# Altium PCB LED_top_level.PcbDoc
Units mil, origin at the board's own origin, x right, y up, seen from the top; angles counter-clockwise.
Board outline 3920 x 1500 mil, 2 copper layers (Top Layer, Bottom Layer); 44 components, 22 nets, 192 pads, 0 vias.
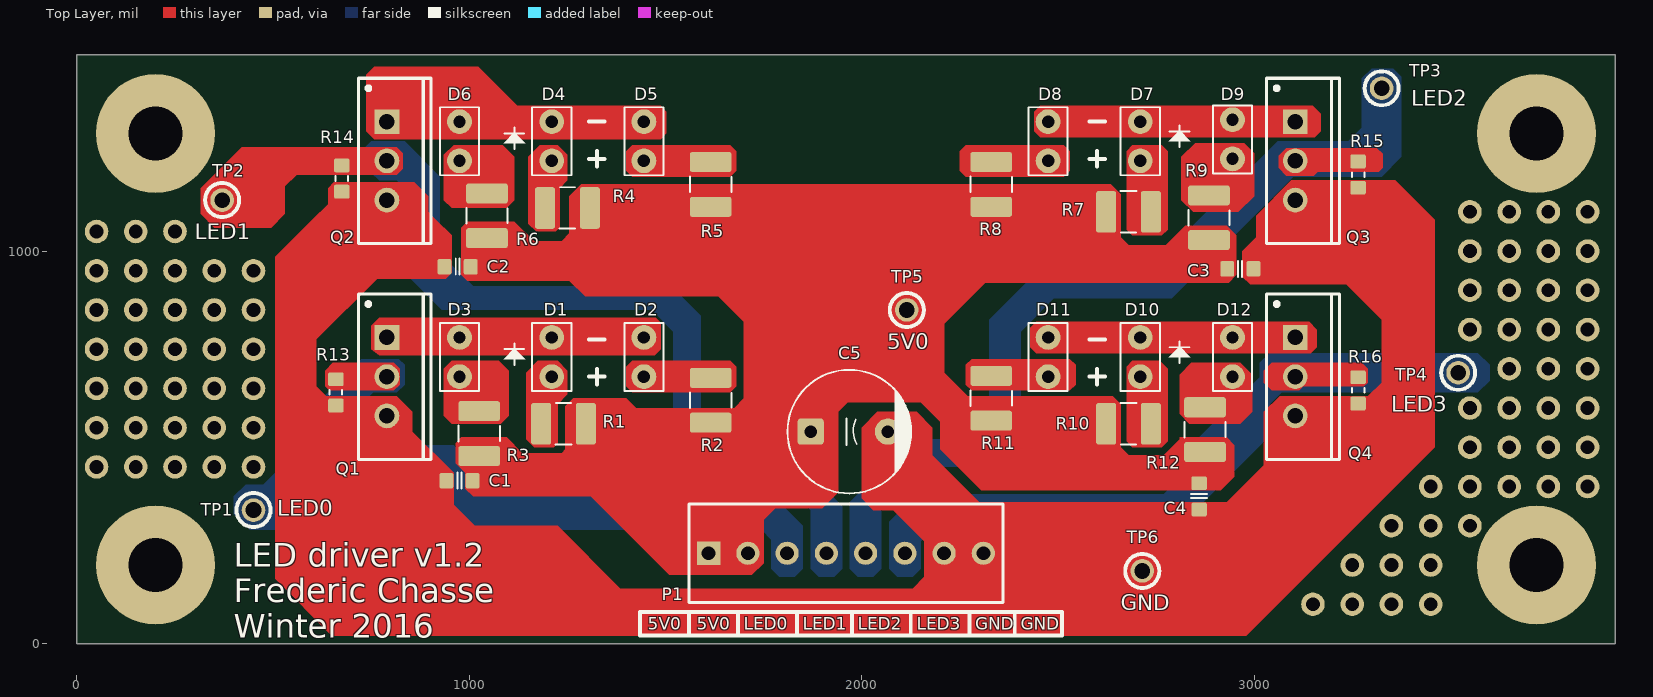
[diagram p0: Top Layer view]
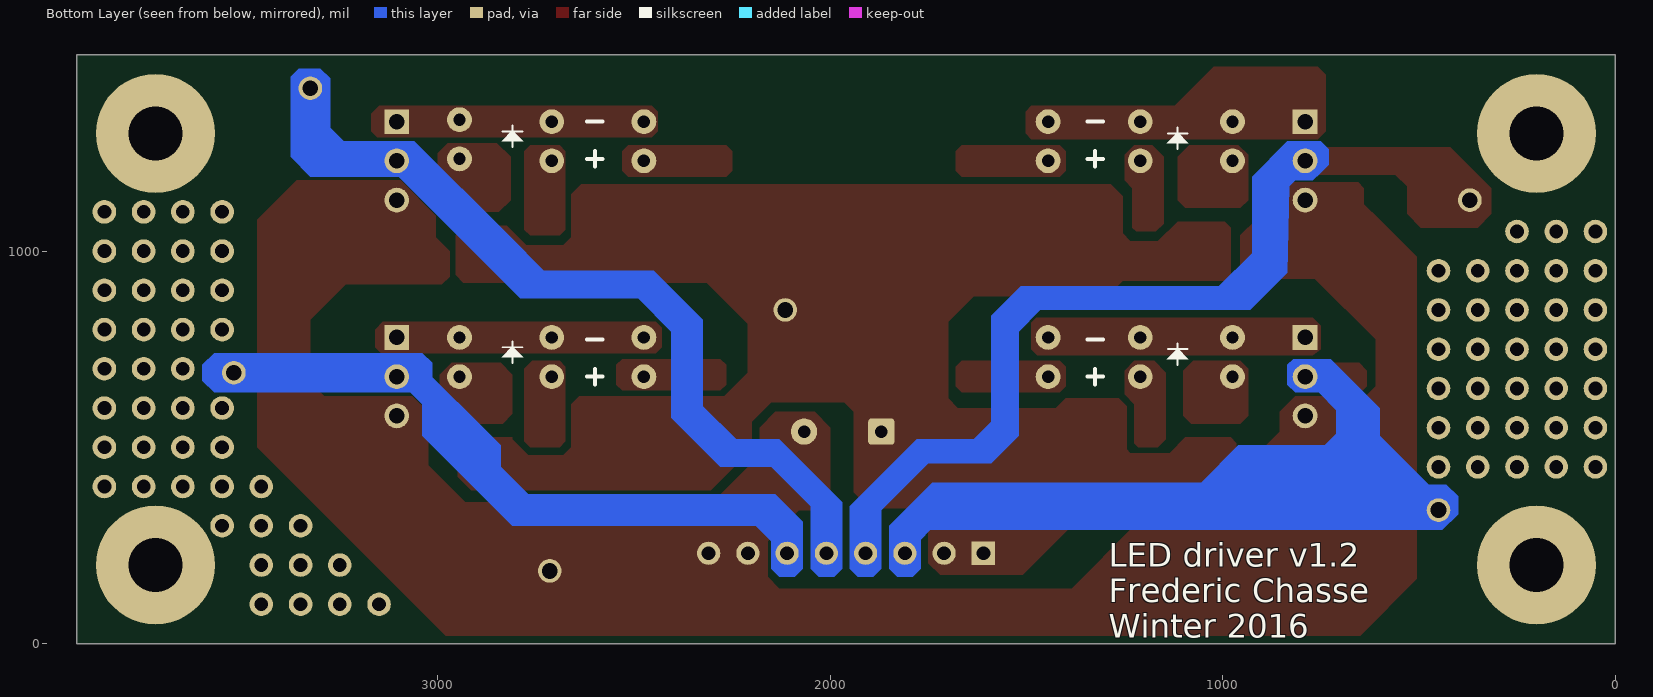
[diagram p1: Bottom Layer view, seen from below]

## Layer stack, top to bottom
Top Solder: solder mask 0.4, Solder Resist, Dk 3.5
Top Layer: signal copper 1.4
Dielectric 1: dielectric 12.6, FR-4, Dk 4.8
Bottom Layer: signal copper 1.4
Bottom Solder: solder mask 0.4, Solder Resist, Dk 3.5

## Board outline
0,0 0,1500 3920,1500 3920,0

## Design rules (kind name [scope] priority, off if disabled: settings)
Clearance "Clearance IC pads" [(HasFootprint('IC-HTSSOP-14') OR HasFootprint('IC-TQFP-64')) vs (HasFootprint('IC-HTSSOP-14') OR HasFootprint('IC-TQFP-64'))] p1: gap=0
Clearance [All] p2: gap=8
HoleSize [All] p1: absolutevalues=TRUE maxlimit=200 minlimit=5 maxpercent=80.000 minpercent=20.000
MinimumSolderMaskSliver [All] p1: minsoldermaskwidth=0
PlaneConnect PlaneConnect_Vias [IsVia] p1: planeconnectstyle=Direct reliefexpansion=20 reliefentries=4 reliefconductorwidth=10 reliefairgap=10
PlaneConnect [All] p2: planeconnectstyle=Relief reliefexpansion=20 reliefentries=4 reliefconductorwidth=40 reliefairgap=10
PolygonConnect PolygonConnect_Vias [IsVia] p1: connectstyle=Direct reliefconductorwidth=10 reliefentries=4 polygonreliefangle="90 Angle" airgapwidth=10
PolygonConnect [All] p2: connectstyle=Relief reliefconductorwidth=40 reliefentries=4 polygonreliefangle="90 Angle" airgapwidth=10
RoutingVias [All] p1: holewidth=14 width=28 viastyle="Through Hole" minholewidth=14 minwidth=28 maxholewidth=28 maxwidth=50
SilkToSilkClearance [All] p1: silktosilkclearance=5
SilkToSolderMaskClearance [IsPad vs IsDesignator OR IsText] p1: minsilkscreentomaskgap=6 clearancetoexposedcopper=TRUE
SolderMaskExpansion [All] p1: expansion=4
Width [All] p1: maxlimit=15 minlimit=8 preferedwidth=10 minimp=50.000000 maximp=50.000000 favimp=50.000000
25 further rules are at their usual default settings.

## Classes and differential pairs
component class top_level: C1 C2 C3 C4 C5 D1 D2 D4 D5 D7 D8 D9 D10 D11 D12 P1 Q1 Q2 Q3 Q4 R1 R2 R4 R5 R7 R8 R9 R10 R11 R12 R13 R14 R15 R16 TP1 TP2 TP3 TP4 TP5 TP6

## Components (designator, comment, footprint, x,y, rotation, side; value= is the part's Value field where it differs from the comment)
C1 "CS - CAPACITOR" CS-0603 975,415 r180 top
C2 "CS - CAPACITOR" CS-0603 970,960 r180 top
C3 "CS - CAPACITOR" CS-0603 2965,955 r0 top
C4 "CS - CAPACITOR" CS-0603 2860,375 r270 top
C5 "CT - CAPACITOR ELECTROLYTIC" CT-CAP-ALUM-8X14 1870,540 r0 top
D1 "LED - NORMAL LED" LED-1 1210,730 r180 top
D2 "LED - NORMAL LED" LED-1 1445,730 r180 top
D3 "LED - NORMAL LED" LED-1 975,730 r180 top
D4 "LED - NORMAL LED" LED-1 1210,1280 r180 top
D5 "LED - NORMAL LED" LED-1 1445,1280 r180 top
D6 "LED - NORMAL LED" LED-1 975,1280 r180 top
D7 "LED - NORMAL LED" LED-1 2710,1280 r180 top
D8 "LED - NORMAL LED" LED-1 2475,1280 r180 top
D9 "LED - NORMAL LED" LED-1 2945,1285 r180 top
D10 "LED - NORMAL LED" LED-1 2710,730 r180 top
D11 "LED - NORMAL LED" LED-1 2475,730 r180 top
D12 "LED - NORMAL LED" LED-1 2945,730 r180 top
P1 "CON - HEADER 1X8" CON-HEADER-1X8 1610,230 r0 top
Q1 "MOSFET-N" TO-220AB 790,680 r270 top
Q2 "MOSFET-N" TO-220AB 790,1230 r270 top
Q3 "MOSFET-N" TO-220AB 3105,1230 r270 top
Q4 "MOSFET-N" TO-220AB 3105,680 r270 top
R1 "RS - RESISTOR" RS-1210 1240,560 r0 top
R2 "RS - RESISTOR" RS-1210 1615,620 r270 top
R3 "RS - RESISTOR" RS-1210 1025,535 r270 top
R4 "RS - RESISTOR" RS-1210 1250,1110 r0 top
R5 "RS - RESISTOR" RS-1210 1615,1170 r270 top
R6 "RS - RESISTOR" RS-1210 1045,1090 r270 top
R7 "RS - RESISTOR" RS-1210 2680,1100 r180 top
R8 "RS - RESISTOR" RS-1210 2330,1170 r270 top
R9 "RS - RESISTOR" RS-1210 2885,1085 r270 top
R10 "RS - RESISTOR" RS-1210 2680,560 r180 top
R11 "RS - RESISTOR" RS-1210 2330,625 r270 top
R12 "RS - RESISTOR" RS-1210 2875,545 r270 top
R13 "RS - RESISTOR" RS-0603 660,640 r90 top
R14 "RS - RESISTOR" RS-0603 675,1185 r90 top
R15 "RS - RESISTOR" RS-0603 3265,1195 r90 top
R16 "RS - RESISTOR" RS-0603 3265,645 r90 top
TP1 "5003K" "TP - VERTICAL" 450,340 r0 top
TP2 "5003K" "TP - VERTICAL" 370,1130 r0 top
TP3 "5003K" "TP - VERTICAL" 3325,1415 r0 top
TP4 "5003K" "TP - VERTICAL" 3520,690 r0 top
TP5 "5003K" "TP - VERTICAL" 2115,850 r0 top
TP6 "5003K" "TP - VERTICAL" 2715,185 r0 top

## Footprints (in the part's own frame and the unit in brackets; to place one, negate y for a bottom-side part, rotate by r counter-clockwise, add the part's x,y. Pads: shape width x height; smd on the part's side, far side on the other; paste and mask are expansions set on the pad)
CON-HEADER-1X8 [mm]
  rect 1.5x1.5 hole 0.9: 1(0,0)
  round 1.5 hole 0.9: 2(2.54,0) 3(5.08,0) 4(7.62,0) 5(10.16,0) 6(12.7,0) 7(15.24,0) 8(17.78,0)
  silkscreen extent -1.27,-3.17 19.05,3.17
CS-0603 [mm]
  round 0.254 on Mech15: 0(0,0)
  rrect25% 0.9x1 smd: 1(-0.85,0) 2(0.85,0)
  Top Layer pour cut-out: -0.6,0.5 -0.4,0.7 0.4,0.7 0.6,0.5 0.6,-0.5 0.4,-0.7 -0.4,-0.7 -0.6,-0.5
  silkscreen extent -0.14,-0.53 0.12,0.51, body extent -0.8,-0.4 0.8,0.4, height 0.3
CT-CAP-ALUM-8X14 [mm] "8mm Dia X 14mm hei, pitch 5mm"
  round 0.508 on Mech15: 0(2.5,0)
  rrect25% 1.7x1.7 hole 0.8: 1(0,0)
  round 1.7 hole 0.8: 2(5,0)
  silkscreen extent -1.5,-4 6.5,4, body extent -1.59,-4.1 6.61,4.1, height 2.4
LED-1 [mm] "LED; 2 Leads"
  round 1.6 hole 0.8: A(0,1.27) K(0,-1.27)
  silkscreen extent -1.27,-2.2 1.27,2.2
RS-0603 [mm]
  round 0.254 on Mech15: 0(0,0)
  rrect25% 0.9x1 smd: 1(-0.85,0) 2(0.85,0)
  Top Layer pour cut-out: -0.6,0.5 -0.4,0.7 0.4,0.7 0.6,0.5 0.6,-0.5 0.4,-0.7 -0.4,-0.7 -0.6,-0.5
  silkscreen extent -0.15,-0.41 0.15,0.41, body extent -0.77,-0.43 0.78,0.42, height 0.45
RS-1210 [mm]
  round 0.508 on Mech15: 0(0,0)
  rrect25% 1.3x2.7 smd: 1(-1.45,0) 2(1.45,0)
  silkscreen extent -0.51,-1.34 0.51,1.34, body extent -1.6,-1.25 1.6,1.25, height 0.55
TO-220AB [mm] "TO, Thru-Hole, Vertical, Heatsink Mounted; 3 In-Line Leads; Pitch 2.54 mm"
  rect 1.6x1.6 hole 1: 1(-2.54,0)
  round 1.6 hole 1: 2(0,0) 3(2.54,0)
  silkscreen extent -5.35,-1.85 5.35,2.85, body extent -5.4,-1.9 5.4,2.9, height 19.3
"TP - VERTICAL" [mil] "Testpoint"
  round 60 hole 40: 1(0,0)
  silkscreen extent -43,-43 43,43, body extent -50,-50 50,50, height 192

## Part data
P1: "100mil header 1 row 6 pins"
Q1 Q2 Q3 Q4: "N-Channel MOSFET"
TP1 TP2 TP3 TP4 TP5 TP6: library part "TP - Test point vertical"

## Free pads (board coordinates)
  round 60 hole 35: 2(50,450) 2(50,550) 2(50,650) 2(50,750) 2(50,850) 2(50,950) 2(50,1050) 2(150,450) 2(150,550) 2(150,650) 2(150,750) 2(150,850) 2(150,950) 2(150,1050) 2(250,450) 2(250,550) 2(250,650) 2(250,750) 2(250,850) 2(250,950) 2(250,1050) 2(350,450) 2(350,550) 2(350,650) 2(350,750) 2(350,850) 2(350,950) 2(450,450) 2(450,550) 2(450,650) 2(450,750) 2(450,850) 2(450,950) 2(3150,100) 2(3250,100) 2(3250,200) 2(3350,100) 2(3350,200) 2(3350,300) 2(3450,100) 2(3450,200) 2(3450,300) 2(3450,400) 2(3550,300) 2(3550,400) 2(3550,500) 2(3550,600) 2(3550,800) 2(3550,900) 2(3550,1000) 2(3550,1100) 2(3650,400) 2(3650,500) 2(3650,600) 2(3650,700) 2(3650,800) 2(3650,900) 2(3650,1000) 2(3650,1100) 2(3750,400) 2(3750,500) 2(3750,600) 2(3750,700) 2(3750,800) 2(3750,900) 2(3750,1000) 2(3750,1100) 2(3850,400) 2(3850,500) 2(3850,600) 2(3850,700) 2(3850,800) 2(3850,900) 2(3850,1000) 2(3850,1100)
  round 303 hole 137.8: 3(200,200) 3(200,1300) 3(3720,200) 3(3720,1300)

## Nets (pads, with @x,y where several pads share a name; then routed paths per layer and width w, separated by ;. In a path a pad name is that pad's centre, name@x,y a point inside that pad or via, vN(x,y) a via of type N, cw(c..) or ccw(c..) an arc to the next point about the centre after c; other vN are vias at no path point)
5V0: C1.1 C2.1 C3.1 C4.1 C5.1 P1.1 P1.2 R1.2 R2.2 R3.2 R4.2 R5.2 R6.2 R7.2 R8.2 R9.2 R10.2 R11.2 R12.2 TP5.1
GND: C1.2 C2.2 C3.2 C4.2 C5.2 P1.7 P1.8 Q1.3 Q2.3 Q3.3 Q4.3 R13.1 R14.1 R15.1 R16.1 TP6.1
LED0: P1.3 Q1.2 R13.2 TP1.1
LED1: P1.4 Q2.2 R14.2 TP2.1
LED2: P1.5 Q3.2 R15.2 TP3.1
LED3: P1.6 Q4.2 R16.2 TP4.1
NetD1_A: D1.A R1.1
NetD1_K: D1.K D2.K D3.K Q1.1
NetD2_A: D2.A R2.1
NetD3_A: D3.A R3.1
NetD4_A: D4.A R4.1
NetD4_K: D4.K D5.K D6.K Q2.1
NetD5_A: D5.A R5.1
NetD6_A: D6.A R6.1
NetD7_A: D7.A R7.1
NetD7_K: D7.K D8.K D9.K Q3.1
NetD8_A: D8.A R8.1
NetD9_A: D9.A R9.1
NetD10_A: D10.A R10.1 | length 131.2
  Top Layer w15: D10.A 2737.09,652.91 R10.1
NetD10_K: D10.K D11.K D12.K Q4.1
NetD11_A: D11.A R11.1
NetD12_A: D12.A R12.1
pads on no net: C1.0 C2.0 C3.0 C4.0 C5.0 R1.0 R2.0 R3.0 R4.0 R5.0 R6.0 R7.0 R8.0 R9.0 R10.0 R11.0 R12.0 R13.0 R14.0 R15.0 R16.0

## Other copper
Top Layer:
  region net 5V0: 1940,590 1980,630 1940,630
  region net NetD1_K: 1120,735 1245,735 1265,755 1265,800 1235,830 770,830 750,810 750,750 770,735
  region net NetD4_K: 1022.5,1470 1122.5,1370 1247.5,1370 1267.5,1350 1267.5,1305 1247.5,1285 757.5,1285 737.5,1305 737.5,1450 757.5,1470
  region net LED2: 3312.5,1262.5 3327.5,1247.5 3327.5,1212.5 3317.5,1202.5 3162.5,1202.5 3152.5,1192.5 3082.5,1192.5 3062.5,1212.5 3062.5,1242.5 3082.5,1262.5
  region net LED3: 3275,715 3290,700 3290,665 3280,655 3125,655 3115,645 3045,645 3025,665 3025,695 3045,715
  region net NetD1_A: 1145,690 1175,720 1225,720 1250,695 1250,635 1225,610 1225,510 1215,500 1165,500 1145,520
  region net NetD4_A: 1150,1240 1180,1270 1225,1270 1250,1245 1250,1180 1230,1160 1230,1060 1220,1050 1170,1050 1150,1070
  region net LED1: 640,1235 655,1250 670,1265 815,1265 830,1250 830,1210 815,1195 650,1195 640,1205
  region net LED0: 632.5,695 652.5,715 807.5,715 822.5,700 822.5,660 807.5,645 642.5,645 632.5,655
  region net NetD7_A: 2675,1055 2690,1040 2765,1040 2780,1055 2780,1255 2765,1270 2690,1270 2675,1255
  region net NetD10_A: 2675,515 2690,500 2765,500 2780,515 2780,700 2760,720 2690,720 2675,705
  region net NetD7_K: 3070,1290 3090,1310 3090,1350 3070,1370 2690,1370 2670,1350 2670,1310 2690,1290
  region net NetD10_K: 3070,740 3090,760 3090,800 3070,820 2690,820 2670,800 2670,760 2690,740
  region net GND: 2160,170 2130,140 1175,140 685,630 635,630 615,650 610,655 610,775 765,930 915,930 915,1080 600,1080 505,985 505,165 650,20 2980,20 2990,30 3120,160 3120,200 2480,200 2400,280 2160,280
  region net GND: 2160,210 2160,260 2080,340 2030,340 2000,370 2000,550 2040,590 2140,590 2180,550 2180,480 2300,360 2930,360 3200,630 3290,630 3325,665 3325,825 3200,950 3095,950 3095,1180 3360,1180 3460,1080 3460,500 3120,160 2200,160
  region net LED1: 715,1265 420,1265 315,1160 315,1095 350,1060 495,1060 530,1095 530,1165 560,1195 715,1195
  region net GND: 600,1080 640,1120 640,1160 655,1175 860,1175 895,1140 895,1100 915,1080
  region net 5V0: 1940,615 2210,615 2210,1150 1700,1150 1700,565 1535,400 1535,175 1720,175 1750,205 1750,315 1780,345 1900,345 1940,385
  region net NetD4_K: 1155,1370 1487.5,1370 1502.5,1355 1502.5,1300 1487.5,1285 1155,1285
  region net NetD5_A: 1415,1270 1665,1270 1680,1255 1680,1205 1665,1190 1415,1190 1400,1205 1400,1255
  region net NetD7_K: 2710,1370 2455,1370 2440,1355 2440,1305 2455,1290 2710,1290
  region net NetD8_A: 2515,1270 2265,1270 2250,1255 2250,1205 2265,1190 2515,1190 2530,1205 2530,1255
  region net NetD1_K: 1140,830 1475,830 1487.5,817.5 1487.5,750 1472.5,735 1140,735
  region net NetD2_A: 1415,720 1665,720 1680,705 1680,655 1665,640 1415,640 1400,655 1400,705
  region net NetD11_A: 2280,725 2530,725 2545,710 2545,660 2530,645 2280,645 2265,660 2265,710
  region net NetD10_K: 2700,820 2445,820 2430,805 2430,755 2445,740 2700,740
  region net 5V0: 1510,175 1285,400 1245,440 1245,605 1265,625 1400,625 1425,600 1675,600 1700,625 1700,175
  region net 5V0: 2150,615 2200,565 2200,495 2305,390 2640,390 2660,410 2660,610 2640,630 2270,630 2210,690 2150,690
  region net 5V0: 2210,815 2315,920 2660,920 2660,1145 2635,1170 1285,1170 1255,1140 1255,925 1295,885 1635,885 1705,815
  region net GND: 960,355 960,435 855,540 855,590 815,630 680,630 680,365 690,355
  region net 5V0: 990,435 965,460 965,510 980,525 1095,525 1135,485 1245,485 1310,420 1310,375 1010,375 990,395
  region net 5V0: 1235,485 1245,495 1245,485
  region net NetD3_A: 935,700 935,580 955,560 1080,560 1100,580 1100,695 1075,720 955,720
  region net GND: 1015,300 1225,300 1385,140 1020,140 1015,135
  region net GND: 915,1080 955,1040 955,945 940,930 915,930
  region net 5V0: 980,940 980,1020 980,1060 995,1075 1115,1075 1165,1025 1235,1025 1255,1045 1255,925 995,925
  region net NetD6_A: 935,1245 960,1270 1085,1270 1115,1240 1115,1130 1095,1110 955,1110 935,1130
  region net NetD7_K: 3070,1370 3150,1370 3170,1350 3170,1305 3155,1290 3070,1290
  region net NetD10_K: 3060,820 3140,820 3160,800 3160,755 3145,740 3060,740
  region net GND: 3095,1180 3005,1090 3005,1035 2970,1000 2970,935 2990,915 3235,915 3235,1180
  region net 5V0: 2955,940 2955,1040 2930,1065 2825,1065 2775,1015 2680,1015 2660,1035 2630,1005 2630,945 2655,920 2875,920 2935,920
  region net NetD9_A: 2815,1130 2815,1240 2850,1275 2975,1275 3000,1250 3000,1140 2960,1100 2845,1100
  region net GND: 3200,630 3065,630 3025,590 3025,455 3200,455
  region net 5V0: 2630,400 2640,390 2915,390 2950,425 2950,505 2930,525 2810,525 2810,520 2770,480 2680,480 2660,500 2630,500
  region net NetD12_A: 2810,585 2810,685 2840,715 2965,715 2995,685 2995,590 2965,560 2835,560
Bottom Layer:
  region net LED0: 710,550 710,595 755,640 815,640 835,660 835,710 820,725 725,725 620,620 600,600 600,550
  region net LED3: 3570,740 3600,710 3600,670 3570,640 3070,640 3040,610 3040,740
  region net LED3: 2070,190 2070,310 2140,380 2770,380 2840,450 2840,505 3062.5,727.5 3090,700 3090,660 3070,640 3040,640 3040,530 2810,300 2190,300 2150,260 2150,190 2130,170 2090,170
  region net LED2: 1970,190 1970,360 2130,520 2240,520 2325,605 2325,825 2450,950 2730,950 2820,1040 3060,1280 3080,1280 3100,1260 3100,1190 2790,880 2490,880 2405,795 2405,575 2280,450 2150,450 2050,350 2050,190 2030,170 1990,170
  region net LED1: 1870,190 1870,340 1750,460 1590,460 1520,530 1520,795 1465,850 930,850 835,945 830,1165 825,1170 815,1180 770,1180 750,1200 730,1220 730,1260 750,1280 835,1280 925,1190 925,995 1010,910 1515,910 1590,835 1590,565 1635,520 1780,520 1950,350 1950,190 1930,170 1890,170
  region net LED0: 1770,190 1770,265 1745,290 905,290 860,335 860,505 960,505 1055,410 1740,410 1850,300 1850,190 1830,170 1790,170
  region net LED2: 3080,1280 3240,1280 3275,1315 3275,1440 3300,1465 3355,1465 3375,1445 3375,1240 3325,1190 3080,1190
  region net LED3: 3040,740 3015,715 3015,680 3040,680
  region net LED0: 575,505 475,405 430,405 400,375 400,330 440,290 905,290 945,330 945,505
  region net LED0: 600,550 600,530 575,505 740,505 710,535 710,550

## Silkscreen, mask and mechanical layers (free items; w line width, h text height)
Top Overlay:
  region: 1087.5,1275 1115,1302.5 1142.5,1275
  region: 1087.5,725 1115,752.5 1142.5,725
  region: 2782.5,1280 2810,1307.5 2837.5,1280
  region: 2782.5,730 2810,757.5 2837.5,730
  lines w5: 1090,750 1140,750 ; 1090,1300 1140,1300 ; 1115,710 1115,730 ; 1115,750 1115,765 ; 1115,1260 1115,1280 ; 1115,1300 1115,1315 ; 2785,755 2835,755 ; 2785,1305 2835,1305 ; 2810,715 2810,735 ; 2810,755 2810,770 ; 2810,1265 2810,1285 ; 2810,1305 2810,1320
  lines w10: 1305,680 1345,680 ; 1305,775 1345,775 ; 1305,1235 1345,1235 ; 1305,1330 1345,1330 ; 1325,660 1325,700 ; 1325,1215 1325,1255 ; 1560,20 1560,80 ; 1685,20 1685,80 ; 1835,20 1835,80 ; 1975,20 1975,80 ; 2125,20 2125,80 ; 2275,20 2275,80 ; 2390,20 2390,80 ; 2580,680 2620,680 ; 2580,775 2620,775 ; 2580,1235 2620,1235 ; 2580,1330 2620,1330 ; 2600,660 2600,700 ; 2600,1215 2600,1255 ; 1435,20 1435,80 2510,80 2510,20 1435,20
  text "LED2" at 3400,1370 h40
  text "LED1" at 300,1030 h40
  text "5V0" at 2065,750 h40
  text "LED3" at 3350,590 h40
  text "LED0" at 510,325 h40
  text "GND" at 2660,85 h40
  text "5V0" at 1455,35 h32
  text "5V0" at 1580,35 h32
  text "LED0" at 1700,35 h32
  text "LED1" at 1850,35 h32
  text "LED2" at 1990,35 h32
  text "LED3" at 2140,35 h32
  text "GND" at 2290,35 h32
  text "GND" at 2405,35 h32
  text "LED driver v1.2 / Frederic Chasse / Winter 2016" at 400,15 h60
Bottom Overlay:
  region: 1087.5,1275 1115,1302.5 1142.5,1275
  region: 1087.5,725 1115,752.5 1142.5,725
  region: 2782.5,1280 2810,1307.5 2837.5,1280
  region: 2782.5,730 2810,757.5 2837.5,730
  lines w5: 1090,750 1140,750 ; 1090,1300 1140,1300 ; 1115,710 1115,730 ; 1115,750 1115,765 ; 1115,1260 1115,1280 ; 1115,1300 1115,1315 ; 2785,755 2835,755 ; 2785,1305 2835,1305 ; 2810,715 2810,735 ; 2810,755 2810,770 ; 2810,1265 2810,1285 ; 2810,1305 2810,1320
  lines w10: 1305,680 1345,680 ; 1305,775 1345,775 ; 1305,1235 1345,1235 ; 1305,1330 1345,1330 ; 1325,660 1325,700 ; 1325,1215 1325,1255 ; 2580,680 2620,680 ; 2580,775 2620,775 ; 2580,1235 2620,1235 ; 2580,1330 2620,1330 ; 2600,660 2600,700 ; 2600,1215 2600,1255
  text "LED driver v1.2 / Frederic Chasse / Winter 2016" at 1290,15 h60
Mechanical 1:
  drawing of 303 lines, arcs and shapes, not listed
  text "Layer" at -282.5,4514.29 h60
  text "Name" at 127.41,4514.29 h60
  text "Material" at 1057.16,4514.29 h60
  text "Thickness" at 1916.92,4514.29 h60
  text "Constant" at 2566.76,4514.29 h60
  text "Board Layer Stack" at 3136.62,4514.29 h60
  text "1" at -282.5,4394.29 h60
  text "Top Overlay" at 127.41,4394.29 h60
  text "2" at -282.5,4274.29 h60
  text "Top Solder" at 127.41,4274.29 h60
  text "Solder Resist" at 1057.16,4274.29 h60
  text "0.40mil" at 1916.92,4274.29 h60
  text "3.5" at 2566.76,4274.29 h60
  text "3" at -282.5,4154.29 h60
  text "Top Layer" at 127.41,4154.29 h60
  text "Copper" at 1057.16,4154.29 h60
  text "1.40mil" at 1916.92,4154.29 h60
  text "4" at -282.5,4034.29 h60
  text "Dielectric 1" at 127.41,4034.29 h60
  text "FR-4" at 1057.16,4034.29 h60
  text "12.60mil" at 1916.92,4034.29 h60
  text "4.8" at 2566.76,4034.29 h60
  text "5" at -282.5,3914.29 h60
  text "Bottom Layer" at 127.41,3914.29 h60
  text "Copper" at 1057.16,3914.29 h60
  text "1.40mil" at 1916.92,3914.29 h60
  text "6" at -282.5,3794.29 h60
  text "Bottom Solder" at 127.41,3794.29 h60
  text "Solder Resist" at 1057.16,3794.29 h60
  text "0.40mil" at 1916.92,3794.29 h60
  text "3.5" at 2566.76,3794.29 h60
  text "7" at -282.5,3674.29 h60
  text "Bottom Overlay" at 127.41,3674.29 h60
Drill Drawing:
  circle w10: c4270.62,565.83 r33.33
  lines w6: 0,0 3920,0 3920,1500 0,1500 0,0
  lines w10: 4237.29,382.5 4270.62,399.17 4303.96,382.5 4287.29,415.83 4303.96,449.17 4270.62,432.5 4237.29,449.17 4253.96,415.83 4237.29,382.5 ; 4237.29,682.5 4237.29,699.17 4253.96,715.83 4237.29,732.5 4237.29,749.17 4253.96,749.17 4270.62,732.5 4287.29,749.17 4303.96,749.17 4303.96,732.5 4287.29,715.83 4303.96,699.17 4303.96,682.5 4287.29,682.5 4270.62,699.17 4253.96,682.5 4237.29,682.5 ; 4237.29,832.5 4303.96,832.5 4303.96,899.17 4237.29,899.17 4237.29,832.5 ; 4237.29,1049.17 4303.96,1049.17 4270.62,982.5 4237.29,1049.17 ; 4237.29,1149.17 4253.96,1149.17 4253.96,1132.5 4287.29,1132.5 4287.29,1149.17 4303.96,1149.17 4303.96,1182.5 4287.29,1182.5 4287.29,1199.17 4253.96,1199.17 4253.96,1182.5 4237.29,1182.5 4237.29,1149.17
  lines w15: 4177.5,337.5 14748.57,337.5 ; 4177.5,1237.5 14748.57,1237.5 ; 4728.38,187.5 4728.38,1387.5 ; 5308.22,187.5 5308.22,1387.5 ; 6457.89,187.5 6457.89,1387.5 ; 6963.76,187.5 6963.76,1387.5 ; 7697.56,187.5 7697.56,1387.5 ; 9197.12,187.5 9197.12,1387.5 ; 9786.96,187.5 9786.96,1387.5 ; 10532.76,187.5 10532.76,1387.5 ; 11182.59,187.5 11182.59,1387.5 ; 12036.35,187.5 12036.35,1387.5 ; 13369.96,187.5 13369.96,1387.5 ; 4177.5,187.5 14748.57,187.5 14748.57,1387.5 4177.5,1387.5 4177.5,187.5
  text "Symbol" at 4267.5,1282.5 h72
  text "Count" at 4773.38,1282.5 h72
  text "Hole Size" at 5353.22,1282.5 h72
  text "Plated" at 6502.89,1282.5 h72
  text "Hole Type" at 7008.76,1282.5 h72
  text "Drill Layer Pair" at 7742.56,1282.5 h72
  text "Via/Pad" at 9242.12,1282.5 h72
  text "Pad Shape" at 9831.96,1282.5 h72
  text "Template" at 10577.76,1282.5 h72
  text "Description" at 11227.59,1282.5 h72
  text "Hole Tolerance (+)" at 12081.35,1282.5 h72
  text "Hole Tolerance (-)" at 13414.96,1282.5 h72
  text "4" at 4773.38,1132.5 h60
  text "137.80mil (3.500mm)" at 5353.22,1132.5 h60
  text "PTH" at 6502.89,1132.5 h60
  text "Round" at 7008.76,1132.5 h60
  text "Top Layer - Bottom Layer" at 7742.56,1132.5 h60
  text "Pad" at 9242.12,1132.5 h60
  text "Rounded" at 9831.96,1132.5 h60
  text "c770h350" at 10577.76,1132.5 h60
  text "6" at 4773.38,982.5 h60
  text "40.00mil (1.016mm)" at 5353.22,982.5 h60
  text "PTH" at 6502.89,982.5 h60
  text "Round" at 7008.76,982.5 h60
  text "Top Layer - Bottom Layer" at 7742.56,982.5 h60
  text "Pad" at 9242.12,982.5 h60
  text "Rounded" at 9831.96,982.5 h60
  text "c152h102" at 10577.76,982.5 h60
  text "8" at 4773.38,832.5 h60
  text "35.43mil (0.900mm)" at 5353.22,832.5 h60
  text "PTH" at 6502.89,832.5 h60
  text "Round" at 7008.76,832.5 h60
  text "Top Layer - Bottom Layer" at 7742.56,832.5 h60
  text "Pad" at 9242.12,832.5 h60
  text "(Mixed)" at 9831.96,832.5 h60
  text "(Mixed)" at 10577.76,832.5 h60
  text "12" at 4773.38,682.5 h60
  text "39.37mil (1.000mm)" at 5353.22,682.5 h60
  text "PTH" at 6502.89,682.5 h60
  text "Round" at 7008.76,682.5 h60
  text "Top Layer - Bottom Layer" at 7742.56,682.5 h60
  text "Pad" at 9242.12,682.5 h60
  text "(Mixed)" at 9831.96,682.5 h60
  text "(Mixed)" at 10577.76,682.5 h60
  text "26" at 4773.38,532.5 h60
  text "31.50mil (0.800mm)" at 5353.22,532.5 h60
  text "PTH" at 6502.89,532.5 h60
  text "Round" at 7008.76,532.5 h60
  text "Top Layer - Bottom Layer" at 7742.56,532.5 h60
  text "Pad" at 9242.12,532.5 h60
  text "(Mixed)" at 9831.96,532.5 h60
  text "(Mixed)" at 10577.76,532.5 h60
  text "75" at 4773.38,382.5 h60
  text "35.00mil (0.889mm)" at 5353.22,382.5 h60
  text "PTH" at 6502.89,382.5 h60
  text "Round" at 7008.76,382.5 h60
  text "Top Layer - Bottom Layer" at 7742.56,382.5 h60
  text "Pad" at 9242.12,382.5 h60
  text "Rounded" at 9831.96,382.5 h60
  text "c152h89" at 10577.76,382.5 h60
  text "131 Total" at 4773.38,232.5 h60

## Dimensions
0,0 to 3920,0 on Mechanical 1
0,1500 to 0,0 on Mechanical 1